# Allegro board IOT_VERSION2.brd
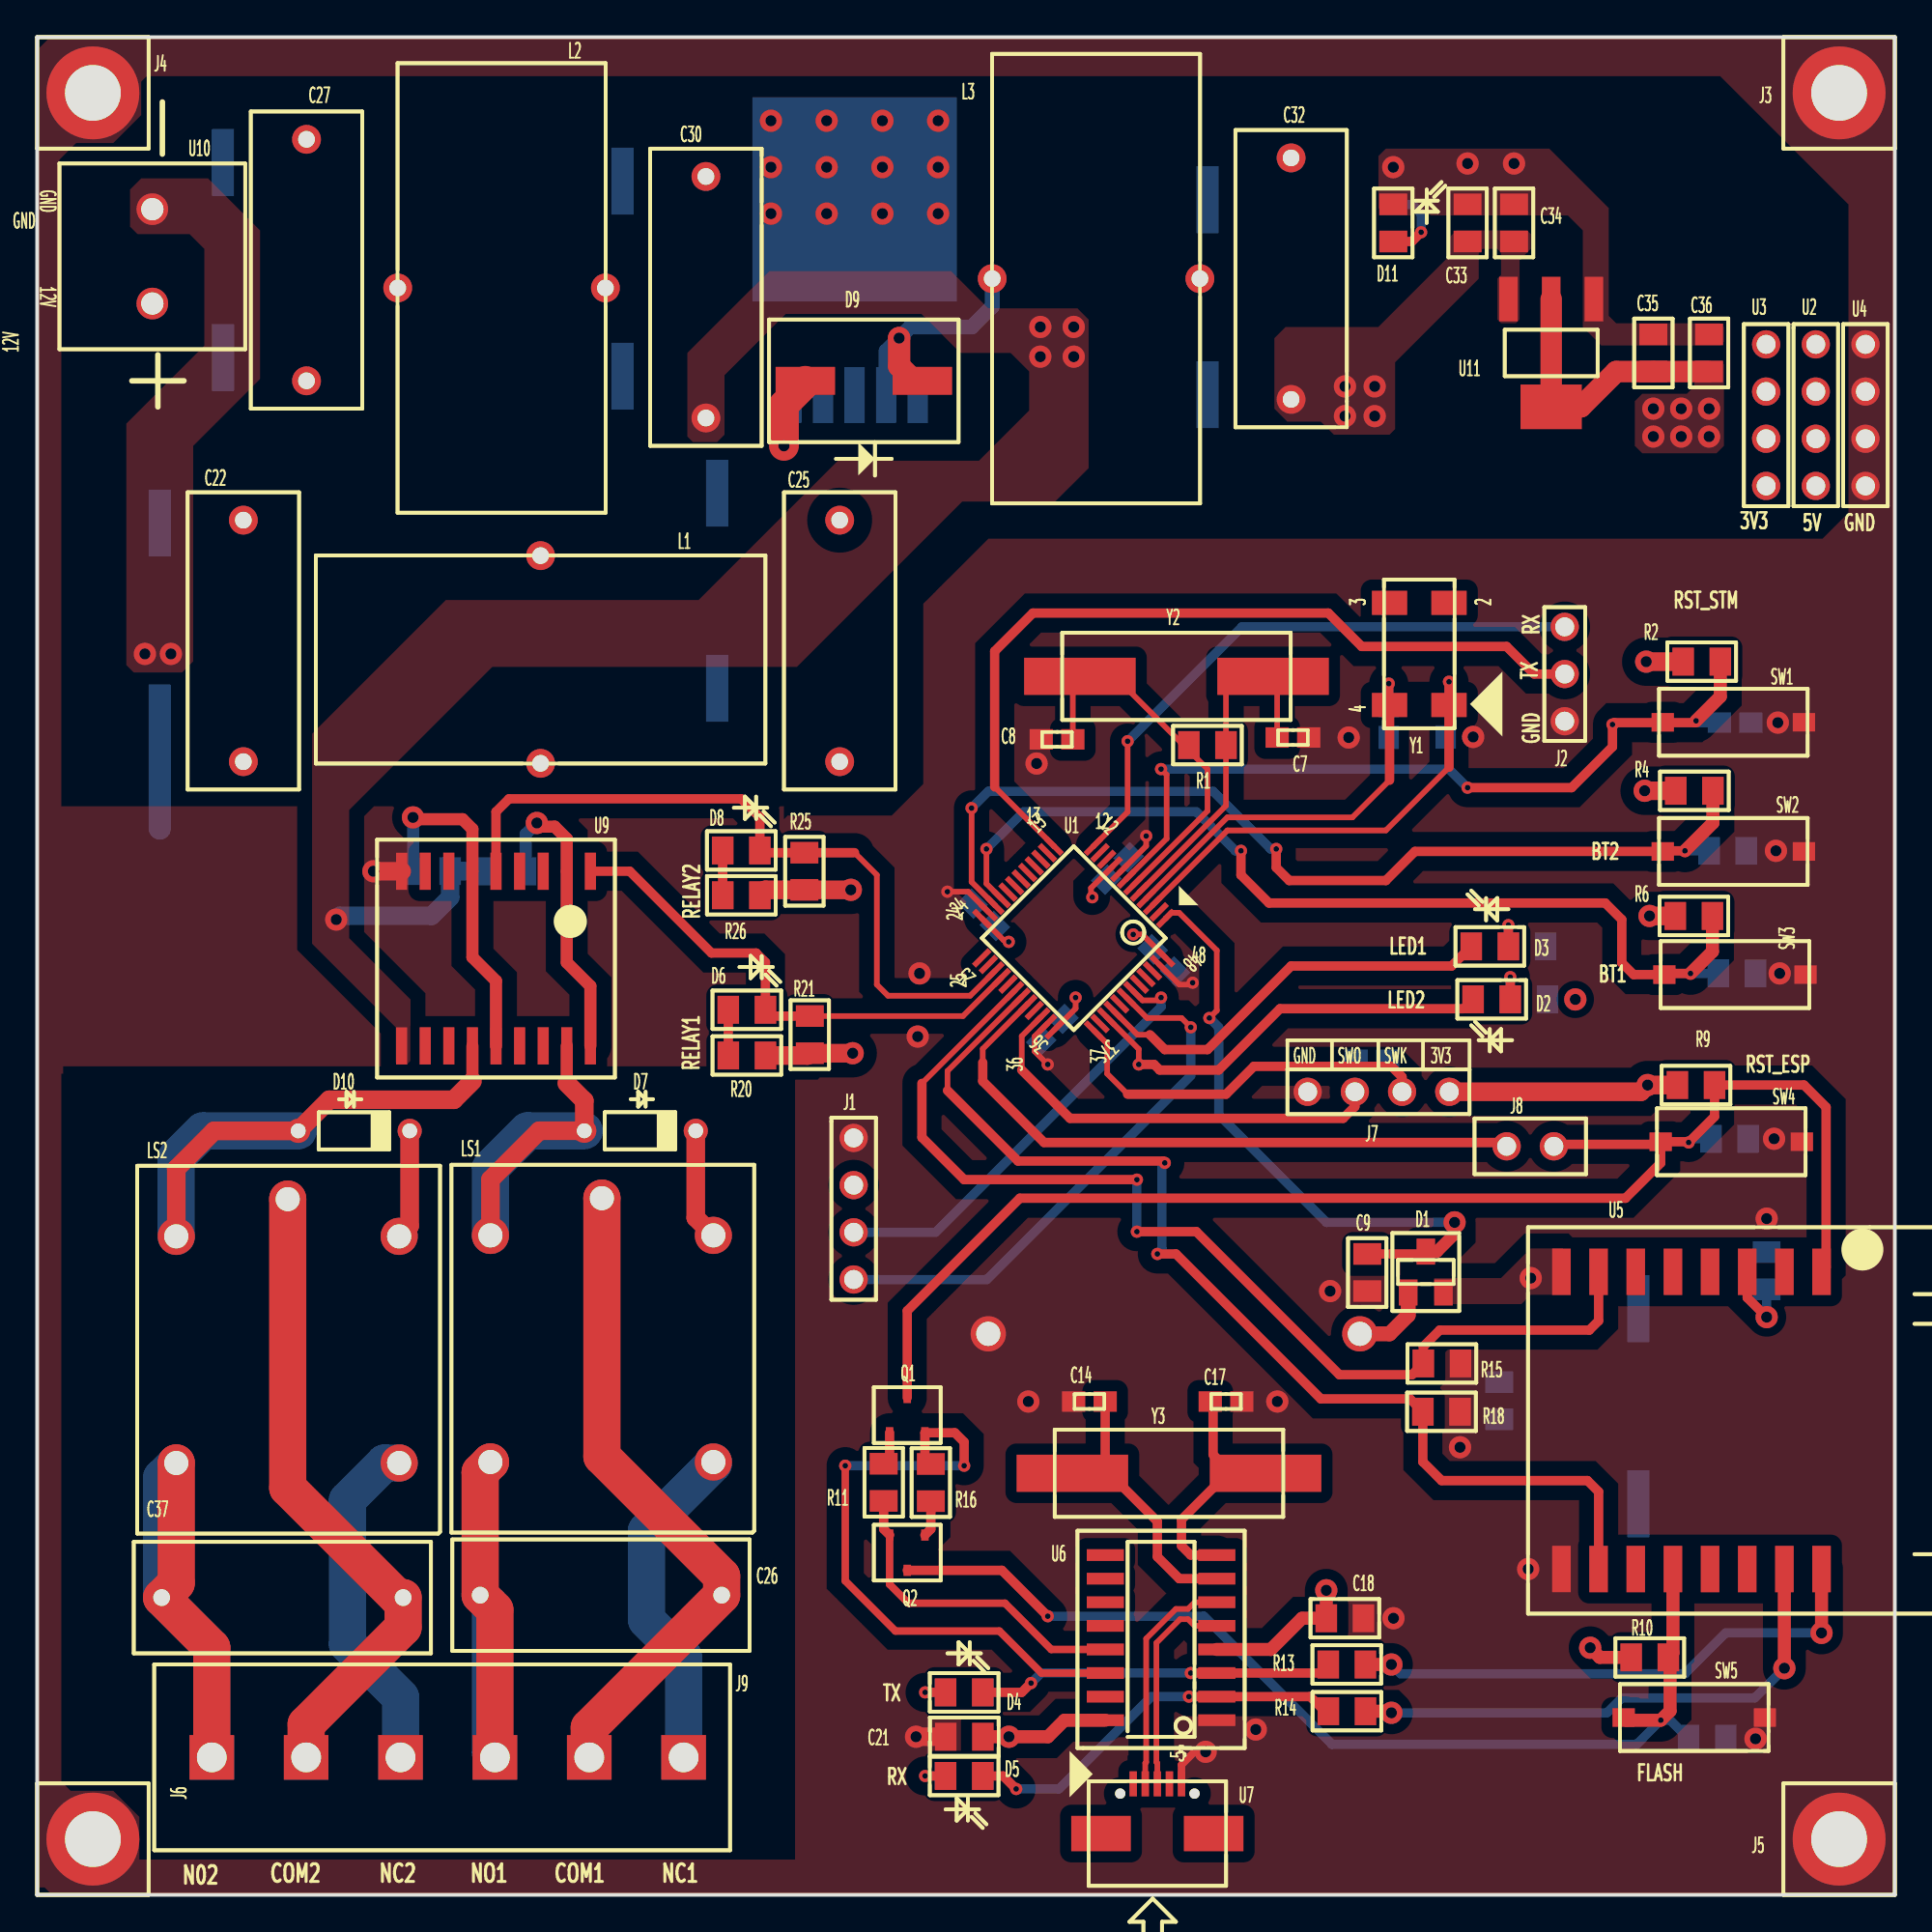
[diagram p0: board, top side]
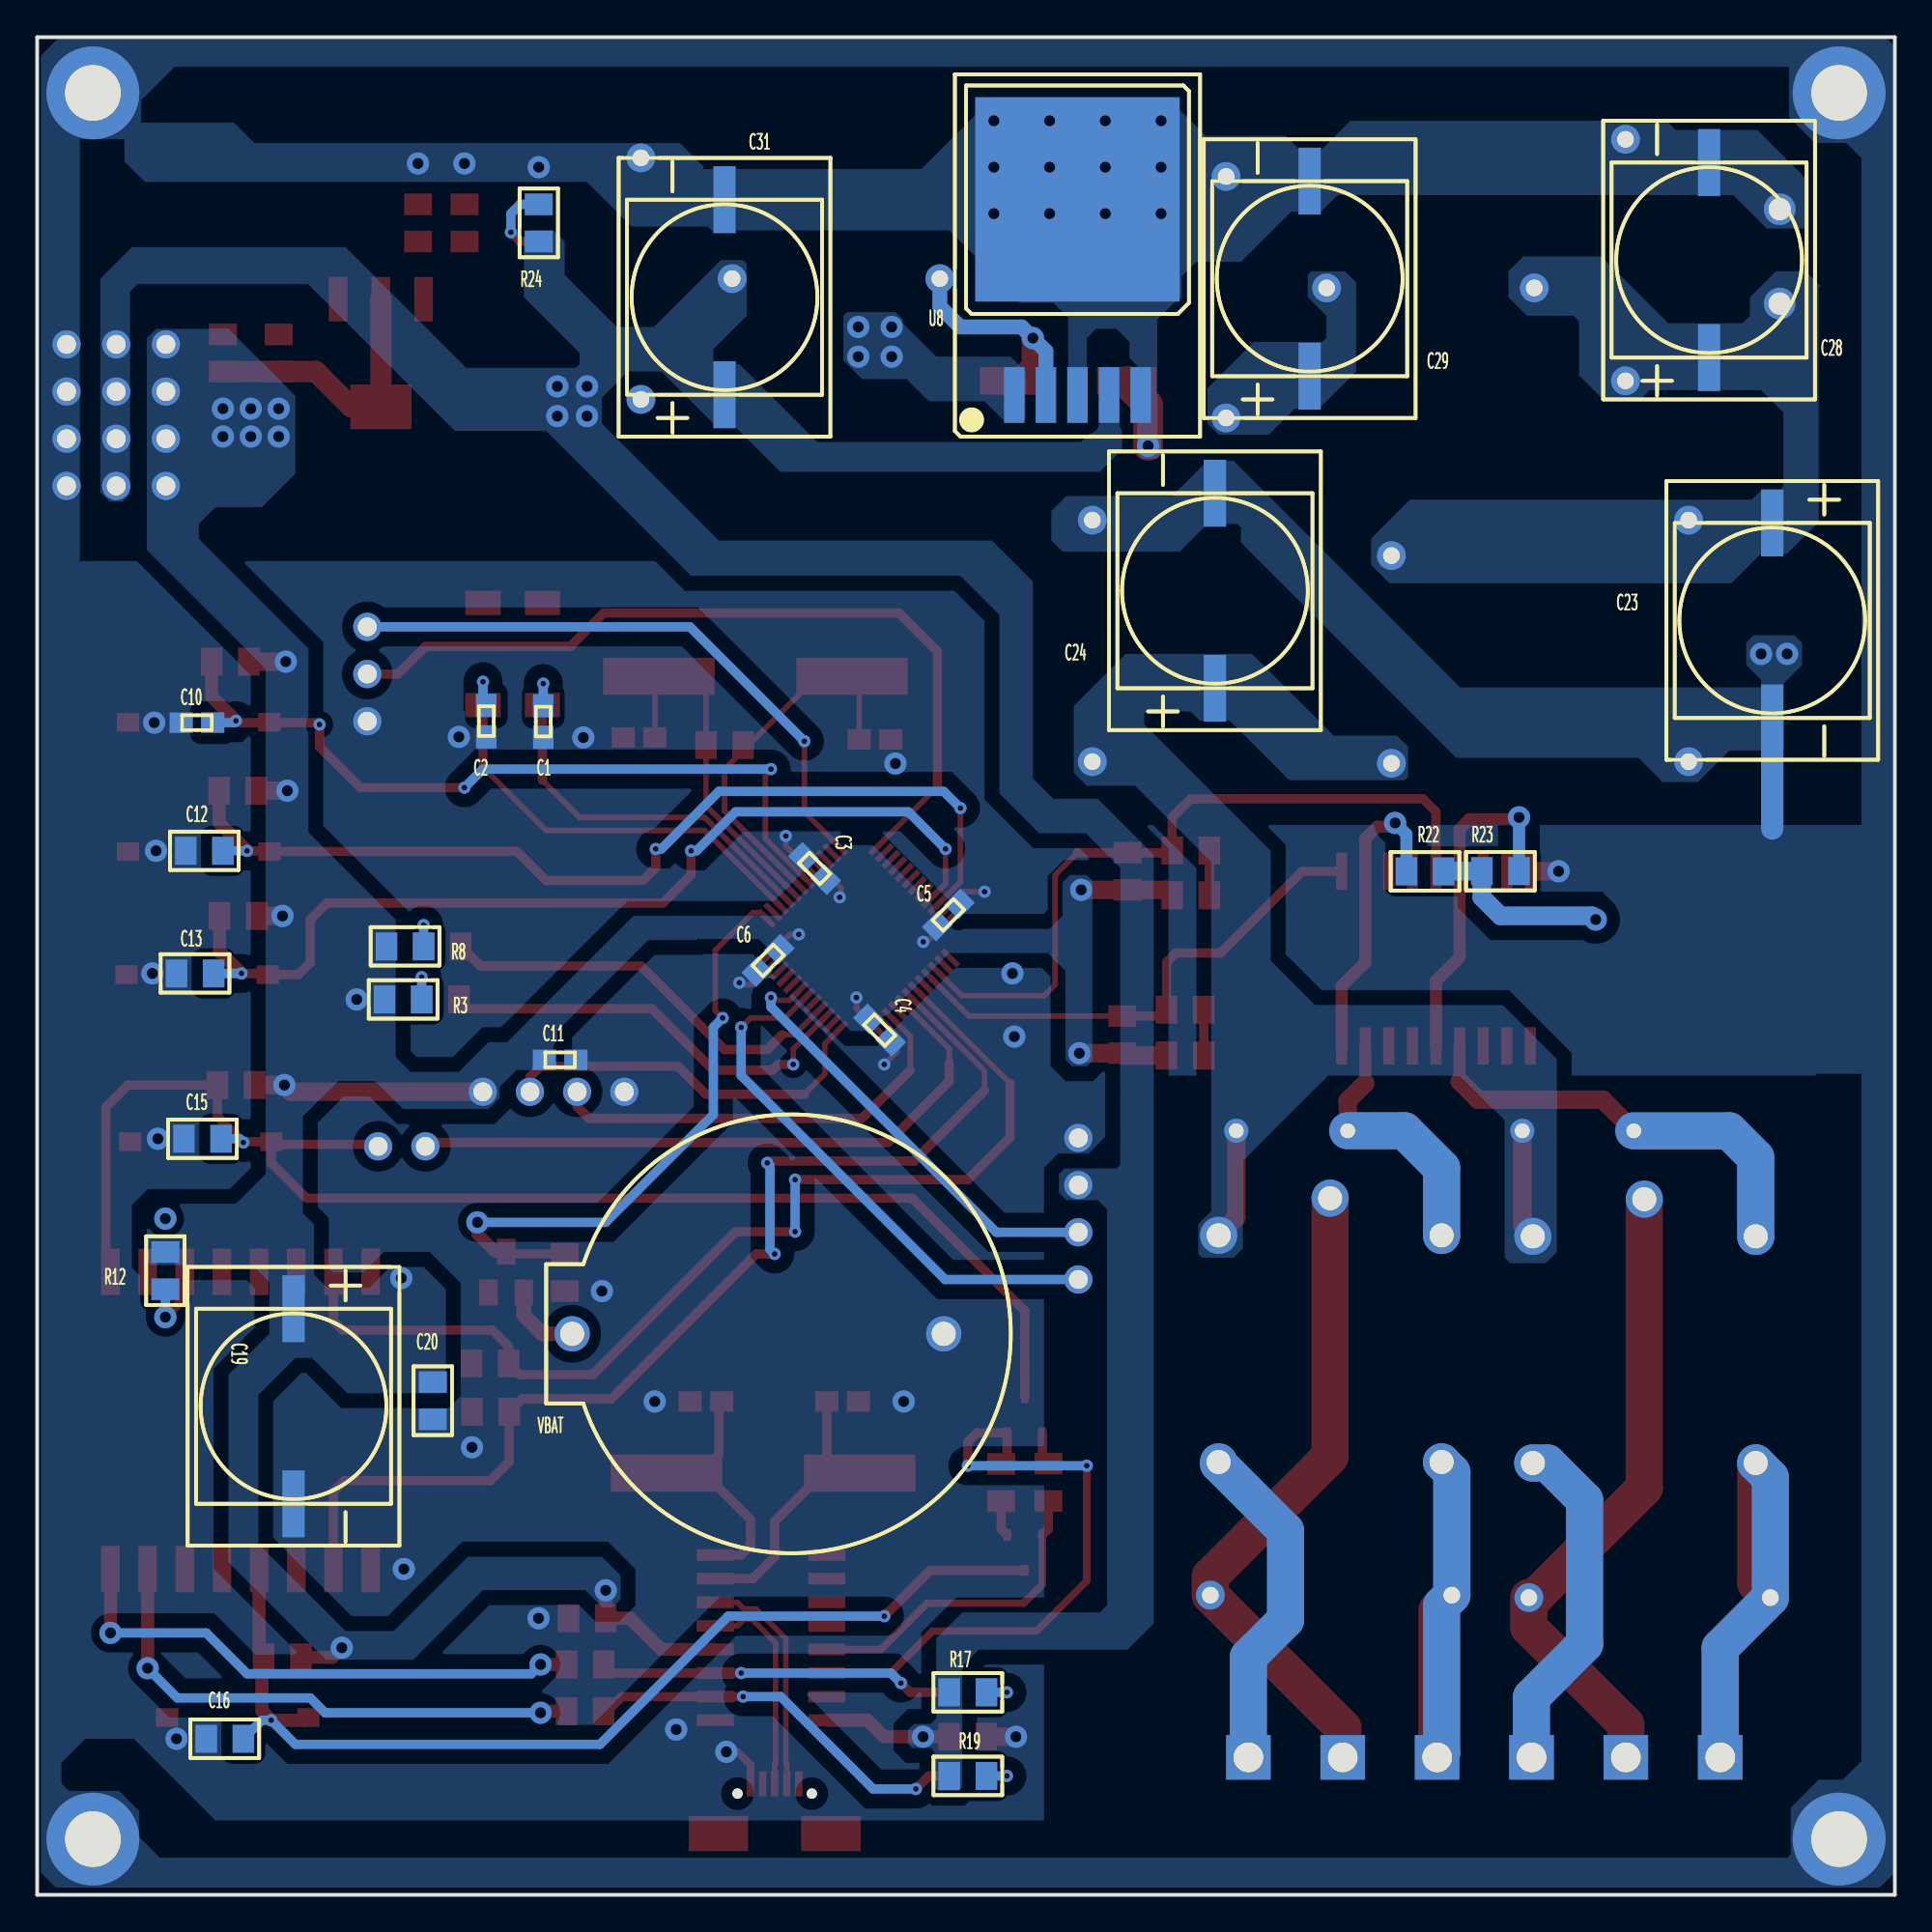
[diagram p1: board, bottom side, seen from below]

Outline 100 x 100 mm; copper layers: TOP, BOTTOM. Coordinates in mm from the lower left corner of the outline.
Outline path: 0,100 100,100 100,0 0,0 0,100

## Design rules (mm)
constraint set DEFAULT: min track width 0.5
net group D: nets D_N D_P
net group PWR: nets COM1 COM2 N23509 N46239 NC1 NC2 NO1 NO2

## Placement (name value [footprint] x y rotation side)
C1  20p  [C0603]  72.76 63.16 90 bottom
C2  20p  [C0603]  75.82 63.18 90 bottom
C3  104  [C0603]  58.15 55.25 45 bottom
C4  104  [C0603]  54.65 46.55 225 bottom
C5  104  [C0603]  50.95 52.75 135 bottom
C6  104  [C0603]  60.65 50.3 315 bottom
C7  20p  [C0603]  67.6 62.3 180 top
C8  20p  [C0603]  54.9 62.2 0 top
C9  104  [R0805]  71.6 33.5 90 top
C10  105  [C0603]  91.4 63.1 0 bottom
C11  104  [C0603]  71.85 44.95 180 bottom
C12  10uf  [R0805]  91 56.2 180 bottom
C13  10uf  [R0805]  91.5 49.6 180 bottom
C14  20p  [C0603]  56.64 26.56 0 top
C15  10uf  [R0805]  91.1 40.7 180 bottom
C16  10uf  [R0805]  89.9 8.4 180 bottom
C17  20p  [C0603]  64 26.56 180 top
C18  10uf  [R0805]  70.39 14.89 180 top
C19  470uF  [CAPACITOR_SMD]  86.2 26.3 270 bottom
C20  10uf  [R0805]  78.7 26.6 90 bottom
C21  100uf  [R0805]  49.91 8.51 0 top
C22  10uf  [CAPACITOR_THR]  11.1 67.5 90 top
C23  22uF  [CAPACITOR_SMD]  6.6 68.6 270 bottom
C24  22uF  [CAPACITOR_SMD]  36.6 70.2 90 bottom
C25  10uf  [CAPACITOR_THR]  43.2 67.5 270 top
C26  CAP 100nF 400V  [CAPACITOR_THR]  30.35 16.13 180 top
C27  10uf  [CAPACITOR_THR]  14.5 88 270 top
C28  470uF  [CAPACITOR_SMD]  10 88 90 bottom
C29  470uF_35v  [CAPACITOR_SMD]  31.5 87 90 bottom
C30  10uf  [CAPACITOR_THR]  36 86 270 top
C31  22uF  [CAPACITOR_SMD]  63 86 90 bottom
C32  10uf  [CAPACITOR_THR]  67.5 87 270 top
C33  10uf  [R0805]  77 90 270 top
C34  10uf  [R0805]  79.5 90 270 top
C35  10uf  [R0805]  87 83 270 top
C36  10uf  [R0805]  90 83 270 top
C37  CAP 100nF 400V  [CAPACITOR_THR]  13.2 16 180 top
D1  BAT54C/SOT  [BAT54C]  74.75 33.53 0 top
D2  LED1  [LED0805]  78.3 48.21 0 top
D3  LED2  [LED0805]  78.2 51.06 0 top
D4  LED2  [LED0805]  49.9 10.9 180 top
D5  LED1  [LED0805]  49.9 6.4 180 top
D6  LED  [LED0805]  38.2 47.64 180 top
D7  1N4007  [DIODE_1N4007]  32.45 41.13 180 top
D8  LED  [LED0805]  37.9 56.22 180 top
D9  DIODE SCHOTTKY31  [SS34]  44.5 81.5 180 top
D10  1N4007  [DIODE_1N4007]  17.05 41.13 180 top
D11  LED  [LED0805]  73 90 270 top
J1  HEADER 4  [HEADER_4X1]  43.95 36.94 0 top
J2  HEADER 3  [HEADER_3X1]  82.23 65.72 180 top
J3  HEADER 1  [PIN_M3]  97 97 0 top
J4  HEADER 1  [PIN_M3]  3 97 0 top
J5  HEADER 1  [PIN_M3]  97 3 0 top
J6  HEADER 1  [PIN_M3]  3 3 0 top
J7  HEADER 4x1  [HEADER_4X1]  72.2 43.23 270 top
J8  -  [HEADER_2X1]  80.37 40.29 90 top
J9  HEADER 6/SM  [TERMINAL_6X1]  37.3 12.4 180 top
L1  10uH  [INDUCTOR_THR]  27.1 66.5 270 top
L2  100uH_3a  [INDUCTOR_THR]  25 86.5 0 top
L3  10uH  [INDUCTOR_THR]  57 87 0 top
LS1  RELAY SPDT  [RL_10A_5V]  30.4 29.4 270 top
LS2  RELAY SPDT  [RL_10A_5V]  13.49 29.35 270 top
Q1  -  [C1815]  46.84 25.82 0 top
Q2  -  [C1815]  46.84 18.42 180 top
R1  1M  [R0805]  62.99 61.89 180 top
R2  10k  [R0805]  89.61 66.38 0 top
R3  440  [R0805]  80.3 48.2 180 bottom
R4  10K  [R0805]  89.21 59.43 180 top
R6  10K  [R0805]  89.18 52.69 180 top
R8  440  [R0805]  80.2 51.06 180 bottom
R9  1K  [R0805]  89.3 43.59 180 top
R10  1K  [R0805]  86.81 12.78 180 top
R11  10K  [R0805]  45.57 22.21 270 top
R12  12k  [R0805]  93.1 33.6 270 bottom
R13  470  [R0805]  70.5 12.4 0 top
R14  470  [R0805]  70.5 9.88 0 top
R15  10k  [R0805]  75.62 28.61 180 top
R16  10K  [R0805]  48.11 22.19 90 top
R17  440  [R0805]  49.9 10.9 180 bottom
R18  10k  [R0805]  75.59 26.01 180 top
R19  440  [R0805]  49.9 6.4 180 bottom
R20  440  [R0805]  38.2 45.18 0 top
R21  10k  [R0805]  41.59 46.3 90 top
R22  10k  [R0805]  25.29 55.09 180 bottom
R23  10k  [R0805]  21.23 55.11 0 bottom
R24  440  [R0805]  73 90 270 bottom
R25  440  [R0805]  41.3 55.1 90 top
R26  440  [R0805]  37.91 53.81 0 top
SW1  SW PUSHBUTTON  [BUTTON_SMD_3X6MM]  91.31 63.12 180 top
SW2  SW TACT-SPST  [BUTTON_SMD_3X6MM]  91.31 56.17 180 top
SW3  SW TACT-SPST  [BUTTON_SMD_3X6MM]  91.39 49.54 180 top
SW4  SW TACT-SPST  [BUTTON_SMD_3X6MM]  91.19 40.54 180 top
SW5  SW TACT-SPST  [BUTTON_SMD_3X6MM]  89.2 9.54 180 top
U1  STM32F103xx  [LQFP48]  55.8 51.5 225 top
U2  -  [HEADER_4X1]  95.74 79.65 0 top
U3  -  [HEADER_4X1]  93.07 79.65 0 top
U4  -  [HEADER_4X1]  98.42 79.65 0 top
U5  ESP8266  [ESP8266_CHIP]  89.05 25.54 270 top
U6  CH340  [CH340G]  63.5 9.4 90 top
U7  USB-MICRO-2.0  [USB-MICRO-B-2_0]  60.3 3.3 0 top
U8  -  [LM2596S]  44 86 180 bottom
U9  -  [ULN2803]  24.7 50.4 180 top
U10  Dominal_2x1  [TERMINAL_2X1]  6.2 88.2 90 top
U11  -  [AMS1117]  81.5 83 180 top
VBAT  BATTERY  [CR2032]  61.2 30.2 0 bottom
Y1  32.768k  [MC306]  74.4 66.8 90 top
Y2  8MHz  [2PIN_SMD_HC49-S]  61.33 65.59 0 top
Y3  12MHZ  [2PIN_SMD_HC49-S]  60.93 22.69 180 top

## Library data of the parts
C1-C8 C10 C11 C14 C17 C26 C37 = CAP NP
C9 C12 C13 C15 C16 C18 C20-C22 C25 C27 C30 C32-C36 = C
C19 C23 C24 C28 C29 C31 = CAP POL
D1 = BAT54C/SOT
D2-D6 D8 D11 = LED
D7 D10 = DIODE_0
D9 = DIODE SCHOTTKY31
J1 J7 = HEADER 4
J2 = HEADER 3_0
J3-J6 = HEADER 1
J8 = HEADER 2
J9 = HEADER 6/SM
L1-L3 = L
LS1 LS2 = RELAY SPDT
Q1 Q2 = 2N1069
R1-R3 R8 R12 R15 R17-R26 = RESISTOR
R4 R6 R9-R11 R13 R14 R16 = R
SW1 = SW PUSHBUTTON
SW2-SW5 = SW TACT-SPST
U1 = STM32F103xx_2
U2-U4 = HEADER_4X1
U5 = ESP8266
U6 = CH340
U7 = USB-MICRO-2.0
U8 = LM2596S
U9 = ULN2803
U10 = Dominal_0
U11 = AMS1117
VBAT = BATTERY
Y1-Y3 = CRYSTAL

## Footprints (pads in the part's own frame, mm; a bottom-side part is the same pattern mirrored in y, then rotated)
2PIN_SMD_HC49-S
  rect 6x2 smd: 1(-5.2,0) 2(5.2,0)
AMS1117
  rect 1x2.4 smd: 1(0,-2.9) 2(2.3,-2.9) 3(-2.3,-2.9)
  rect 3.3x2.4 smd: 4(0,2.9)
BAT54C
  rect 1x1.4 smd: 1(-0.95,-1.1) 2(0.95,-1.1) 3(0,1.1)
BUTTON_SMD_3X6MM
  rect 1.2x1 smd: 1(-3.8,0) 2(3.8,0)
C0603
  rect 1.25x1.1 smd: 1(-0.85,0) 2(0.85,0)
C1815
  rect 0.4x0.6 smd: 1(-0.95,-0.95) 2(0,0.95) 3(0.95,-0.95)
CAPACITOR_SMD
  rect 3.6x1.2 smd: 1(-5.25,0) 2(5.25,0)
CAPACITOR_THR
  round 1.55 hole 0.9: 1(-6.5,0) 2(6.5,0)
CH340G
  rect 0.63x2 smd: 1(0,0) 2(1.27,0) 3(2.54,0) 4(3.81,0) 5(5.08,0) 6(6.35,0) 7(7.62,0) 8(8.89,0) 9(8.89,6) 10(7.62,6) 11(6.35,6) 12(5.08,6) 13(3.81,6) 14(2.54,6) 15(1.27,6) 16(0,6)
CR2032
  round 1.9 hole 1.3: 1(10,0) 2(-10,0)
DIODE_1N4007
  round 1.3 hole 0.8: 1(-3,0) 2(3,0)
ESP8266_CHIP
  rect 2.5x1 smd: 1(-8,7) 2(-8,5) 3(-8,3) 4(-8,1) 5(-8,-1) 6(-8,-3) 7(-8,-5) 8(-8,-7) 9(8,-7) 10(8,-5) 11(8,-3) 12(8,-1) 13(8,1) 14(8,3) 15(8,5) 16(8,7)
HEADER_2X1
  round 1.52 hole 1.02: 1(0,1.27) 2(0,-1.27)
HEADER_3X1
  round 1.52 hole 1.02: 1(0,2.54) 2(0,0) 3(0,-2.54)
HEADER_4X1
  round 1.52 hole 1.02: 1(0,3.81) 2(0,1.27) 3(0,-1.27) 4(0,-3.81)
INDUCTOR_THR
  round 1.55 hole 0.9: 1(-5.59,0) 2(5.59,0)
LED0805
  rect 1.162x1.504 smd: 1(-1,0) 2(1,0)
LM2596S
  rect 1.1x3 smd: 1(-3.4,-5.265) 2(-1.7,-5.265) 3(0,-5.265) 4(1.7,-5.265) 5(3.4,-5.265)
  rect 11x11 smd: 6(0,5.265)
LQFP48
  rect 1.2x0.3 smd: 1(-4.25,2.75) 2(-4.25,2.25) 3(-4.25,1.75) 4(-4.25,1.25) 5(-4.25,0.75) 6(-4.25,0.25) 7(-4.25,-0.25) 8(-4.25,-0.75) 9(-4.25,-1.25) 10(-4.25,-1.75) 11(-4.25,-2.25) 12(-4.25,-2.75) 25(4.25,-2.75) 26(4.25,-2.25) 27(4.25,-1.75) 28(4.25,-1.25) 29(4.25,-0.75) 30(4.25,-0.25) 31(4.25,0.25) 32(4.25,0.75) 33(4.25,1.25) 34(4.25,1.75) 35(4.25,2.25) 36(4.25,2.75)
  rect 0.3x1.2 smd: 13(-2.75,-4.25) 14(-2.25,-4.25) 15(-1.75,-4.25) 16(-1.25,-4.25) 17(-0.75,-4.25) 18(-0.25,-4.25) 19(0.25,-4.25) 20(0.75,-4.25) 21(1.25,-4.25) 22(1.75,-4.25) 23(2.25,-4.25) 24(2.75,-4.25) 37(2.75,4.25) 38(2.25,4.25) 39(1.75,4.25) 40(1.25,4.25) 41(0.75,4.25) 42(0.25,4.25) 43(-0.25,4.25) 44(-0.75,4.25) 45(-1.25,4.25) 46(-1.75,4.25) 47(-2.25,4.25) 48(-2.75,4.25)
MC306
  rect 1.3x1.9 smd: (2.75,1.6) (2.75,-1.6) 1(-2.75,-1.6) 2(-2.75,1.6)
PIN_M3
  round 5 hole 3: 1(0,0)
R0805
  rect 1.162x1.504 smd: 1(-1,0) 2(1,0)
RL_10A_5V
  round 2 hole 1.3: 1(-6.1,6) 2(-6.1,-6) 3(-8.1,0) 4(6.1,-6) 5(6.1,6)
SS34
  rect 3.2x1.5 smd: 1(-3.15,0) 3(3.15,0)
TERMINAL_2X1
  round 1.7 hole 1.2: 1(2.54,0) 2(-2.54,0)
TERMINAL_6X1
  rect 2.4x2.4 hole 1.6: 1(2.5,5) 2(7.58,5) 3(12.66,5) 4(17.74,5) 5(22.82,5) 6(27.9,5)
ULN2803
  rect 0.6x2 smd: 1(-5.08,-4.7) 2(-3.81,-4.7) 3(-2.54,-4.7) 4(-1.27,-4.7) 5(0,-4.7) 6(1.27,-4.7) 7(2.54,-4.7) 8(3.81,-4.7) 9(5.08,-4.7) 10(5.08,4.7) 11(3.81,4.7) 12(2.54,4.7) 13(1.27,4.7) 14(0,4.7) 15(-1.27,4.7) 16(-2.54,4.7) 17(-3.81,4.7) 18(-5.08,4.7)
USB-MICRO-B-2_0
  rect 3.205x1.9 smd: (-3.032,0) (3.032,0)
  round 0.551 hole 0.55: (-2,2.15) (2,2.15)
  rect 0.4x1.35 smd: 1(-1.3,2.675) 2(-0.65,2.675) 3(0,2.675) 4(0.65,2.675) 5(1.3,2.675)

## Nets
3V3: C3.1 C4.1 C5.1 C6.1 C11.1 C18.2 C19.1 C20.2 C35.2 C36.2 D1.2(C2) J7.1 R2.1 R3.1 R4.2 R6.2 R8.1 R9.2 R10.2 R12.1 R20.2 R21.1 R25.1 R26.2 U1.9 U1.24 U1.36 U1.48 U3.1 U3.2 U3.3 U3.4 U5.8(VDD) U6.4 U11.1 U11.4(OUT_T)
5V: C21.2 C31.1 C32.2 C33.2 C34.2 J1.2 L3.2 R17.1 R19.1 R24.2 U2.1 U2.2 U2.3 U2.4 U6.16 U8.4 U11.2
12V: C24.1 C25.2 D7.1(K) D10.1(K) L1.2 LS1.1 LS2.1
12VIN: C22.2 C23.1 C27.2 C28.1 L1.1 L2.1 U10.2
12VOUT: C29.1 C30.2 L2.2 R22.2 R23.2 U8.1(VIN) U9.10
GND: C1.1 C2.1 C3.2 C4.2 C5.2 C6.2 C7.1 C8.1 C9.1 C10.2 C11.2 C12.1 C13.1 C14.1 C15.1 C16.1 C17.1 C18.1 C19.2 C20.1 C21.1 C22.1 C23.2 C24.2 C25.1 C27.1 C28.2 C29.2 C30.1 C31.2 C32.1 C33.1 C34.1 C35.1 C36.1 D9.3 D11.1(CATHODE) J1.1 J2.1 J3.1 J4.1 J5.1 J6.1 J7.4 R15.1 R18.1 SW1.1 SW2.1 SW3.1 SW4.1 SW5.1 U1.8 U1.23 U1.35 U1.47(VSS_3) U4.1 U4.2 U4.3 U4.4 U5.9 U6.1 U7.5 U8.3 U8.5 U8.6 U9.9 U10.1 U11.3 VBAT.2(-)
VBAT: C9.2 D1.3 U1.1
BT1: C13.2 R6.1 SW3.2 U1.21
BT2: C12.2 R4.1 SW2.2 U1.22
COM1: C26.1 J9.2 LS1.3
COM2: C37.1 J9.5 LS2.3
D_N: U6.6 U7.2
D_P: U6.5 U7.3
ENB_RESET: J8.1 U1.32
FLASH: C16.2 Q2.2 R10.1 SW5.2 U5.12
LED1: D2.1(CATHODE) U1.39
LED2: D3.1(CATHODE) U1.40
NC1: J9.1 LS1.5
NC2: J9.4 LS2.5
NO1: C26.2 J9.3 LS1.4(NO)
NO2: C37.2 J9.6 LS2.4(NO)
NRST: C15.2 J8.2 Q1.2 R9.1 SW4.2 U5.1
OSCIN: C7.2 R1.1 U1.5 Y2.2
OSCOUT: C8.2 R1.2 U1.6 Y2.1
PA0: U1.10
PA1: U1.11
PA4: U1.14
PA5: U1.15
PA6: U1.16
PA7: U1.17
PA8: U1.29
PA12: U1.33
PA15: U1.38
PB0: U1.18
PB1: U1.19
PB2: U1.20
PB5: U1.41
PB8: U1.45
PB9: U1.46
PB12: U1.25
PB13: U1.26
PC13: U1.2
PC14: C2.2 U1.3 Y1.1
PC15: C1.2 U1.4 Y1.2
RELAY1: D6.1(CATHODE) R21.2 U1.28 U9.1
RELAY2: D8.1(CATHODE) R25.2 U1.27 U9.5
RESET: C10.1 R2.2 SW1.2 U1.7
RX: J2.2 U1.13
RX_ESP: R15.2 U1.30 U5.7
RXD0: R14.2 U5.15
SCL: J1.4 U1.42
SDA: J1.3 U1.43
SWCLK: J7.2 U1.37
SWIO: J7.3 U1.34
TX: J2.3 U1.12
TX_ESP: R18.2 U1.31 U5.10
TXD0: R13.2 U5.16
XI: C14.2 U6.7(XI) Y3.2
XO: C17.2 U6.8 Y3.1
N02174: D2.2 R3.2
N02178: D3.2 R8.2
N23509: D10.2 LS2.2 U9.13
N29658: D6.2 R20.1
N34721: D1.1 VBAT.1
N37534: D9.1(CATHODE) L3.1 U8.2
N37634: D11.2 R24.1
N45950: R22.1 U9.2 U9.18
N46239: D7.2 LS1.2 U9.17
N46900: D8.2 R26.1
N48132: R23.1 U9.6 U9.14
N71730: R12.2 U5.3
N78013: Q1.1 R11.1
N78017: Q2.1 R16.1
N78025: Q2.3(E) R11.2 U6.13
N78046: Q1.3(E) R16.2 U6.14
N80376: D4.1(CATHODE) R13.1 U6.3
N80380: D5.1(CATHODE) R14.1 U6.2
N86911: D5.2 R19.2
N86957: D4.2 R17.2

Pads without a net: U1 44; U5 2 4 5 6 11 13 14; U6 9 10 11 12 15; U7 1 4; U9 3 4 7 8 11 12 15 16

## Via types
v1: diameter 0.66, hole 0.305, TOP to BOTTOM, 43 vias
v2: diameter 1.2, hole 0.6, TOP to BOTTOM, 74 vias

## Routing (per net, layer and track width the routed paths; a pad name or vN(x,y) marks a point on that pad's centre or on a via; arc(x,y) is an arc through that point)
3V3: length 61.5
  TOP w0.3: 57.92,55.39 56.73,54.2 56.73,53.77 v1(56.8,53.7) ; U1.36 55.9,47.71 v1(55.9,48.3) ; U1.24 52.01,51.4 52.2,51.4 v1(52.3,51.3) ; v1(59,51.7) 59.49,51.7 U1.48
  TOP w0.7: U6.4 66.41,13.21 68.09,14.89 C18.2 v2(69.39,16.39) ; v2(83.6,13.3) 84.12,12.78 R10.2
  TOP w1: J7.1 86.33,43.23 v2(86.69,43.59) R9.2 ; v2(43.9,45.3) R21.1 41.47,45.18 R20.2 ; R2.1 v2(86.62,66.38) ; R6.2 v2(86.79,52.69) ; v2(43.8,54.1) R25.1 39.2,54.1 R26.2 ; R4.2 v2(86.53,59.43)
  TOP w1.15: C36.2 C35.2 85,82 83.1,80.1 U11.4 U11.1
  vias: v2(80.4,33.2) v2(82.8,48.2) v2(87,80) v2(87,78.5) v2(88.5,80) v2(88.5,78.5) v2(90,80) v2(90,78.5)
5V: length 7
  TOP w0.7: C21.2 v2(52.31,8.51) 54.41,8.51 55.3,9.4 U6.16
  vias: v2(70.4,81.2) v2(70.4,79.6) v2(72,81.2) v2(72,79.6)
12V: length 11.9
  TOP w1: LS2.1 20.05,36.01 D10.1 ; LS1.1 35.45,36.45 D7.1
12VOUT: length 10.1
  BOTTOM w1: R22.2 24.28,55.11 R23.2 22.23,53.7 21.23,52.7 16.3,52.7 v2(16.1,52.5)
  vias: v2(54,84.4) v2(54,82.8) v2(55.8,84.4) v2(55.8,82.8)
GND: length 26.1
  TOP w0.3: v1(54.4,44.7) 53.7,45.4 53.7,46.22 U1.35 ; 58.27,55.04 59.7,56.46 v1(59.7,57) ; U1.23 50.12,54 v1(49,54) ; v1(62.2,49.1) 62.1,49 61.48,49 U1.47
  TOP w0.4: v2(62.9,7.7) 62.3,7.7 61.6,7 U7.5
  TOP w0.5: 70.6,62.5 v2(70.6,62.3)
  TOP w1: U9.9 v2(18.1,55.1) ; C21.1 v2(47.31,8.51)
  TOP w1.6: D9.3 41.35,81.35 40.2,80.2 v2(40.2,78)
  BOTTOM w1.2: 6.6,57.4 C23.2
  vias: v2(5.8,66.8) v2(7.2,66.8) v2(39.5,95.5) v2(39.5,93) v2(39.5,90.5) v2(42.5,95.5) v2(42.5,93) v2(42.5,90.5) v2(45.5,95.5) v2(45.5,93) v2(45.5,90.5) v2(47.4,46.2) v2(47.5,49.6) v2(48.5,95.5) v2(48.5,93) v2(48.5,90.5) v2(53.36,26.56) v2(53.8,60.9) v2(65.6,8.9) v2(66.76,26.56) v2(69.6,32.5) v2(73,93) v2(73.01,14.89) v2(76.59,24.09) v2(77,93.2) v2(77.3,62.33) v2(79.5,93.2) v2(80.26,17.54) v2(92.5,8.4) v2(93.1,36.4) v2(93.5,40.7) v2(93.6,56.2) v2(93.7,63.1) v2(93.8,49.6)
VBAT: length 33.8
  TOP w0.3: U1.1 60.75,52.56 61.05,52.87 61.47,52.87 63.5,50.84 63.5,47.6 v1(63.1,47.2)
  TOP w0.5: D1.3 74.63,34.5 C9.2
  TOP w0.65: v2(76.3,36.2) 76.3,35.58 75.35,34.63 D1.3
  BOTTOM w0.5: v1(63.1,47.2) 63.6,46.7 63.6,42 69.4,36.2 v2(76.3,36.2)
BT1: length 52.6
  TOP w0.3: 51.91,53.62 51.1,54.43 v1(51.1,56.3)
  TOP w0.5: v1(89,49.6) 87.66,49.6 SW3.2 85.94,49.54 85.3,50.17 85.3,52.5 84.41,53.39 66.31,53.39 64.8,54.9 v1(64.8,56.2)
  TOP w0.7: v1(89,49.6) 90.18,50.78 R6.1
  BOTTOM w0.5: v1(51.1,56.3) 53.1,58.3 62.4,58.3 64.5,56.2 v1(64.8,56.2) ; C13.2 v1(89,49.6)
BT2: length 52.9
  TOP w0.3: v1(50.3,58.5) 50.3,54.53 U1.22 51.56,53.27
  TOP w0.5: v1(66.7,56.3) 66.7,55.3 67.4,54.6 72.6,54.6 74.17,56.17 SW2.2 87.54,56.2 v1(88.7,56.2)
  TOP w0.7: v1(88.7,56.2) 90.21,57.71 R4.1
  BOTTOM w0.5: v1(66.7,56.3) 66.4,56.3 63.3,59.4 51.2,59.4 v1(50.3,58.5) ; C12.2 v1(88.7,56.2)
COM1: length 35.7
  TOP w2: J9.2 29.72,9.01 C26.1 36.85,17.15 30.4,23.6 LS1.3
COM2: length 35
  TOP w2: J9.5 14.48,9.18 19.7,14.4 C37.1 19.4,16 13.49,21.91 LS2.3
D_N: length 12.4
  TOP w0.3: U7.2 59.65,7.09 59.7,7.14 59.7,13.79 61.3,15.39 61.95,15.39 62.31,15.75 U6.6
D_P: length 11.5
  TOP w0.3: U6.5 62.31,14.48 61.95,14.84 61.52,14.84 60.25,13.56 60.25,7.14 60.3,7.09 U7.3
ENB_RESET: length 34.8
  TOP w0.3: 50.9,44.8 50.9,45.54 U1.32 53.33,47.96
  TOP w0.5: J8.1 78.9,40.5 54.2,40.5 50.9,43.8 50.9,44.8
FLASH: length 57.4
  TOP w0.5: Q2.2 51.93,17.47 v1(54.4,15)
  TOP w0.7: U5.12 88.05,13.03 R10.1 87.9,12.69 87.9,9.9 v1(87.4,9.4) 85.55,9.4 SW5.2
  BOTTOM w0.5: C16.2 87.9,9.4 v1(87.4,9.4) 86.1,8.1 69.7,8.1 62.8,15 v1(54.4,15)
LED1: length 23
  TOP w0.3: v1(59.3,44.7) 59.3,45.52 57.57,47.26
  TOP w0.5: D2.1 76.79,47.7 66.9,47.7 63.6,44.4 60.43,44.4 60.13,44.7 v1(59.3,44.7)
LED2: length 22.5
  TOP w0.3: 57.92,47.61 59.23,46.3 59.9,46.3
  TOP w0.5: D3.1 76.14,50 67.5,50 63,45.5 60.7,45.5 59.9,46.3
NC1: length 18.2
  BOTTOM w2: J9.1 34.8,12.8 32.8,14.8 32.8,19.6 36.4,23.2 LS1.5
NC2: length 18.6
  BOTTOM w2: J9.4 19.56,10.64 16.7,13.5 16.7,21.25 18.7,23.25 LS2.5
NO1: length 32.9
  TOP w2: J9.3 24.64,15.34 C26.2 23.85,22.75 LS1.4
  BOTTOM w2: LS1.4 23.85,22.75 C26.2 24.4,15.58 24.4,7.64 J9.3
NO2: length 34.6
  TOP w2: J9.6 9.4,13.3 C37.2 7.49,16.79 LS2.4
  BOTTOM w2: J9.6 9.4,13.3 C37.2 6.7,22.46 LS2.4
NRST: length 77.5
  TOP w0.5: SW4.2 88.86,40.54 v1(88.9,40.5) 90.3,41.9 R9.1 95.11,43.59 96.3,42.4 96.3,33.78 U5.1 ; SW4.2 87.39,39.39 85.5,37.5 52.9,37.5 46.84,31.44 Q1.2 ; SW4.2 87.25,40.4 81.75,40.4 J8.2
  BOTTOM w0.5: C15.2 89.1,40.7 v1(88.9,40.5)
OSCIN: length 19.2
  TOP w0.3: C7.2 66.75,65.37 Y2.2 64.49,65.59 63.99,65.09 R1.1 63.99,58.63 59.34,53.98
OSCOUT: length 20.6
  TOP w0.3: C8.2 55.75,65.22 Y2.1 58.01,65.59 61.71,61.89 R1.2 61.99,61.6 63,60.6 63,58.35 U1.6
PC14: length 25
  TOP w0.3: 60.04,53.27 60.04,53.27 64.07,57.3 72.6,57.3 76,60.7
  TOP w0.5: 76,60.7 Y1.1 v1(76,65.3)
  BOTTOM w0.5: v1(76,65.3) 76,64.21 75.82,64.03
PC15: length 22.2
  TOP w0.3: 59.69,53.62 59.69,53.62 64.07,58 70.8,58 72.8,60
  TOP w0.5: v1(72.76,65.2) 72.76,64.09 Y1.2 72.8,60
  BOTTOM w0.5: C1.2 v1(72.76,65.2)
RELAY1: length 27.7
  TOP w0.3: R21.2 49.84,47.3 51.91,49.38
  TOP w0.5: U9.1 31.9,55.1 36.3,50.7 38.7,50.7 39.2,50.2 D6.1 39.54,47.3 R21.2
RELAY2: length 39.8
  TOP w0.3: 44,56.1 45.2,54.9 45.2,49 45.8,48.4 50.23,48.4 51.56,49.73
  TOP w0.5: 44,56.1 R25.2 39.02,56.1 D8.1 38.9,58 37.9,59 25.4,59 24.7,58.3 U9.5
RESET: length 43.4
  TOP w0.3: v1(60.5,60.6) 60.8,60.3 60.8,56.85 U1.7
  TOP w0.5: v1(77,59.6) 82.6,59.6 84.8,61.8 v1(84.8,63) 84.9,63.1 87.49,63.1 SW1.2 87.53,63.1 89.2,63.1 v1(89.3,63.2)
  TOP w0.7: v1(89.3,63.2) 90.61,64.5 R2.2
  BOTTOM w0.5: v1(77,59.6) 76,60.6 v1(60.5,60.6) ; v1(89.3,63.2) 89.4,63.1 C10.1
RX: length 44.7
  TOP w0.3: U1.13 54.74,56.45 51.54,59.64
  TOP w0.5: J2.2 80.58,65.72 79.1,67.2 71.3,67.2 69.5,69 53.6,69 51.54,66.94 51.54,59.64
RX_ESP: length 57.7
  TOP w0.3: 47.63,43.68 U1.30
  TOP w0.5: 47.63,43.68 47.63,40.77 49.9,38.5 v1(59.2,38.5) ; v1(59.2,35.7) 62.4,35.7 70.1,28 74.01,28 R15.2 74.62,29.52 75.5,30.4 83.55,30.4 84.05,30.9 U5.7
  BOTTOM w0.5: v1(59.2,35.7) v1(59.2,38.5)
RXD0: length 28.9
  TOP w0.7: U5.15 v2(94.05,12.2) ; v2(72.9,9.8) 72.82,9.88 R14.2
  BOTTOM w0.5: v2(72.9,9.8) 84.5,9.8 85.3,10.6 92.45,10.6 v2(94.05,12.2)
SCL: length 29.4
  TOP w0.3: v1(62.1,46.7) 61.6,47.2 59.75,47.2 U1.42
  BOTTOM w0.5: J1.4 51.12,33.12 62.1,44.1 v1(62.1,46.7)
SDA: length 23.9
  TOP w0.3: v1(60.5,48.3) 60.35,48.15 59.5,48.15 U1.43
  BOTTOM w0.5: v1(60.5,48.3) 60.5,47.8 48.37,35.66 J1.3
SWCLK: length 20.6
  TOP w0.3: 58.7,43.1 57.6,44.2 57.6,45.81 U1.37
  TOP w0.5: 58.7,43.1 64,43.1 65.5,44.6 72.9,44.6 73.47,44.03 J7.2
SWIO: length 23.4
  TOP w0.3: 54.03,47.26 53,46.23 53,44.4
  TOP w0.5: 53,44.4 55.6,41.8 70.3,41.8 70.93,42.43 J7.3
TX: length 32.5
  TOP w0.3: 56.86,56.45 U1.12 58.7,58.29 v1(58.7,62.1)
  BOTTOM w0.5: J2.3 64.86,68.26 v1(58.7,62.1)
TX_ESP: length 59.8
  TOP w0.3: U1.31 49,44.35 49,43.3
  TOP w0.5: v1(60.3,34.5) 61.3,34.5 69.1,26.7 73.9,26.7 R18.2 74.59,23.31 75.6,22.3 83.45,22.3 84.05,21.7 U5.10 ; v1(60.7,39.4) 60.6,39.5 52.8,39.5 49,43.3
  BOTTOM w0.5: v1(60.3,34.5) 60.55,34.75 60.55,39.25 v1(60.7,39.4)
TXD0: length 29.1
  TOP w0.7: R13.2 v2(72.9,12.4) ; U5.16 v2(96.05,14.1)
  BOTTOM w0.5: v2(72.9,12.4) 73.4,11.9 88.7,11.9 90.9,14.1 v2(96.05,14.1)
XI: length 15.3
  TOP w0.5: 56.99,22.69 57.49,23.19 C14.2 ; 56.99,22.69 57.71,22.69 60.3,20.1 60.3,18.2 61.48,17.02 U6.7 ; 56.99,22.69 Y3.2
XO: length 13.4
  TOP w0.5: 64.31,22.69 64.09,22.69 61.6,20.2 61.6,18.79 62.1,18.29 U6.8 ; 64.31,22.69 63.3,23.7 63.3,26.4 C17.2 ; 64.31,22.69 Y3.1
N02174: length 2.4
  TOP w0.5: v1(79.3,49.4) 79.3,48.21 D2.2
  BOTTOM w0.5: R3.2 v1(79.3,49.4)
N02178: length 2.3
  TOP w0.5: D3.2 v1(79.2,52.2)
  BOTTOM w0.5: v1(79.2,52.2) D3.2
N23509: length 34.8
  TOP w0.65: U9.13 23.43,43.8
  TOP w1: LS2.2 7.49,39.09 9.53,41.13 D10.2 15.73,42.8 22.43,42.8 23.43,43.8
  BOTTOM w2: LS2.2 7.49,39.69 8.93,41.13 D10.2
N29658: length 2.5
  TOP w0.5: D6.2 37.2,47.64 R20.1
N34721: length 4.2
  TOP w0.8: D1.1 73.8,31.2 72.8,30.2 VBAT.1
N37534: length 13.7
  TOP w1.2: v2(46.4,83.8) 46.4,82.3 47.2,81.5 D9.1
  BOTTOM w0.8: U8.2 45.7,83.1 v2(46.4,83.8) 47,84.4 50.31,84.4 51.41,85.5 L3.1
N37634: length 4.4
  TOP w0.5: v1(74.5,89.5) 74,89 D11.2
  BOTTOM w0.5: v1(74.5,89.5) 74.5,90.5 74,91 R24.1
N45950: length 16.5
  TOP w0.65: U9.18 29.78,48.92 28.51,50.19 U9.2 28.51,56.85 27.86,57.5 27.1,57.5 v2(26.9,57.7)
  BOTTOM w0.65: R22.1 26.29,57.09 v2(26.9,57.7)
N46239: length 23.6
  TOP w0.65: U9.17 28.51,43.69
  TOP w1: LS1.2 24.4,38.5 27.03,41.13 29.45,41.13 29.45,42.75 28.51,43.69
  BOTTOM w2: LS1.2 24.4,39.13 26.4,41.13 29.45,41.13
N46900: length 2.4
  TOP w0.5: D8.2 36.9,53.81 R26.1
N48132: length 18.5
  TOP w0.65: U9.14 24.7,49.2 23.43,50.47 U9.6 23.43,57.37 22.9,57.9 20.33,57.9 v2(20.23,58)
  BOTTOM w0.65: R23.1 v2(20.23,58)
N71730: length 4.4
  TOP w0.5: U5.3 92.05,32.15 v2(93.1,31.1)
  BOTTOM w0.5: R12.2 v2(93.1,31.1)
N78013: length 1.8
  TOP w0.5: R11.1 45.89,23.53 Q1.1
N78017: length 2
  TOP w0.5: Q2.1 48.11,19.69 R16.1
N78025: length 17.7
  TOP w0.4: Q2.3 45.89,16.71 46.9,15.7 52.1,15.7 54.59,13.21 U6.13
  TOP w0.5: Q2.3 45.57,19.69 R11.2
N78046: length 34.1
  TOP w0.4: v1(43.5,23.1) 43.5,16.9 46.2,14.2 51.8,14.2 54.06,11.94 U6.14
  TOP w0.5: v1(49.9,23.1) 49.9,24.37 49.4,24.87 Q1.3 47.79,23.51 R16.2
  BOTTOM w0.5: v1(43.5,23.1) v1(49.9,23.1)
N80376: length 19.2
  TOP w0.5: v1(53.5,11.4) 53,10.9 D4.1 ; v1(62.1,11.94) U6.3 69.04,11.94 R13.1
  BOTTOM w0.5: v1(53.5,11.4) 54.04,11.94 v1(62.1,11.94)
N80380: length 21.3
  TOP w0.5: v1(52.7,5.7) 52,6.4 D5.1 ; v1(62,10.67) U6.2 68.53,10.67 69.32,9.88 R14.1
  BOTTOM w0.5: v1(52.7,5.7) 55,5.7 59.97,10.67 v1(62,10.67)
N86911: length 2.2
  TOP w0.5: D5.2 v1(47.8,6.4)
  BOTTOM w0.5: v1(47.8,6.4) D5.2
N86957: length 2.2
  TOP w0.5: v1(47.8,10.9) D4.2
  BOTTOM w0.5: D4.2 v1(47.8,10.9)

## Copper pours and planes (outline as drawn; the poured copper is in the pictures)
3V3 on TOP: 75.2,33.2 78.8,33.2 80.4,34.8 82.1,34.8 82.5,34.4 82.5,32.5 82.3,32.3 80.4,32.3 79.9,31.8 75.4,31.8 75.2,32
3V3 on TOP: 89.2,82 89.2,81.2 88.8,80.8 86.4,80.8 86,80.4 86,78 86.4,77.6 90.4,77.6 90.8,78 90.8,82.4 89.6,82.4
3V3 on BOTTOM: 86.1,76.5 86.1,80.7 89.7,84.3 93.6,84.3 94.1,83.8 94.1,72.4 87.7,66 87.7,38.8 89.3,37.2 93.7,37.2 94.1,36.8 94.1,34.1 93.9,33.9 88.4,33.9 87.5,33 87.5,30.2 89.7,28 89.7,17.9 84.4,12.6 79.8,12.6 76,16.4 70.5,16.4 69.6,15.5 69,15.5 68.6,15.9 68.6,17.2 69.6,18.2 76.8,18.2 80.8,14.2 83.4,14.2 88.1,18.9 88.1,26.9 86.1,28.9 85.2,28.9 83.3,27 78.2,27 78,27.2 78,32.6 79.2,33.8 81,33.8 82.1,32.7 84.4,32.7 85.1,33.4 85.1,36.1 85.7,36.7 85.7,41.9 83.8,43.8 81.8,43.8 80.3,42.3 75.7,42.3 75.1,42.9 75.1,43.5 74.2,44.4 72.2,44.4 72,44.6 72,46.5 67.1,51.4 64.5,51.4 64.4,51.5 64.35,51.45 61.15,51.45 56.2,46.5 55.1,46.5 50.9,50.7 45.6,50.7 44.65,49.75 44.65,44.95 44.3,44.6 43.5,44.6 43.2,44.9 43.2,54.6 43.5,54.9 44.4,54.9 44.8,54.5 44.8,52.7 45.5,52 50.5,52 55,56.5 56.2,56.5 60,52.7 67.9,52.7 74.7,45.9 75.7,45.9 77.3,44.3 79.9,44.3 80.7,45.1 80.7,52.5 85.4,57.2 85.4,67.1 91.3,73 91.3,73.8 90.4,74.7 87.9,74.7
5V on TOP: 66.6,83.8 67.2,84.4 72.2,84.4 76,88.2 76,89.2 76.4,89.6 80.2,89.6 80.4,89.4 80.4,88.6 79.8,88 79.8,84.8 79.6,84.6 78.8,84.6 78.6,84.8 78.6,87 78.8,87.2 78.8,88.4 78.6,88.6 77.8,88.6 77.6,88.4 77.6,87 73.1,82.5 73.1,78.9 72.8,78.6 69.8,78.6 69.1,79.3 67.3,79.3 66.6,80
5V on BOTTOM: 42.4,82.2 41.8,82.2 41.6,82 41.6,77.8 42.8,76.6 60,76.6 62.4,79 63.4,79 66.4,82 68.2,82 69.6,80.6 69.6,79.2 63.3,72.9 48.6,72.9 46.4,70.7 46.4,60.1 45.3,59 42.9,59 39.9,56 39.9,14.6 41.3,13.2 49.3,13.2 50.2,12.3 50.2,5.8 50.4,5.6 51.5,5.6 51.7,5.8 51.7,7.7 51.9,7.9 52.9,7.9 53.1,8.1 53.1,8.9 52.8,9.2 51.9,9.2 51.6,9.5 51.6,13.8 50.2,15.2 42.8,15.2 42.4,15.6 42.4,36.9 42.9,37.4 44.6,37.4 45,37.8 45,38.8 44.7,39.1 41.9,39.1 41.7,39.3 41.7,55.3 43.55,57.15 46.05,57.15 48.2,59.3 48.2,68.9 50.3,71 64.8,71 72.6,78.8 77.5,78.8 85.4,86.7 94.6,86.7 95,86.3 95,75.4 95.4,75 96.1,75 96.6,75.5 96.6,87 94.9,88.7 83.4,88.7 76.9,82.2 71,82.2 70.8,82.4 70.8,83 73.8,86 73.8,89.2 73.4,89.6 72.2,89.6 71.6,89 71.6,87.2 68.8,84.4 66.8,84.4 63.2,88 62,88 61.8,87.8 61.8,85 63.6,83.2 63.6,82.6 63.4,82.4 62.2,82.4 58,78.2 43.8,78.2 42.8,79.2 42.8,81.8
12V on BOTTOM: 26.2,60.2 26.2,61.8 26.8,62.4 30.2,62.4 34.6,66.8 41.4,66.8 44.2,64 44.2,60.4 43.5,59.7 41,59.7 40.95,59.75 36.8,55.6 36.8,36.8 37.5,36.1 37.5,34.5 37.3,34.3 35.6,34.3 35.1,34.8 35.1,39.5 30.5,44.1 23.4,44.1 21,41.7 21,34.3 20.7,34 18.8,34 18.2,34.6 18.2,45 21.1,47.9 31.2,47.9 33.6,50.3 33.6,56.2 40.4,63 40.4,63.6 40.3,63.7 37.9,63.7 37.4,63.2 35.8,63.2 32.6,60 26.4,60
12VIN on BOTTOM: 4.1,73.9 5.8,72.2 7.2,72.2 8.8,70.6 27.2,70.6 28.2,71.6 28.2,73 26.1,75.1 7.7,75.1 7.2,75.6 6.2,75.6 6,75.8 6,79.8 7.2,81 13.2,81 13.6,80.6 15.8,80.6 17,81.8 17,84.7 17.3,85 19.8,85 20.8,86 20.8,87.4 20,88.2 15.8,88.2 12.2,84.6 8.2,84.6 7.8,85 7.8,86 6.4,87.4 4.8,87.4 4,86.6 4.1,86.5
12VOUT on TOP: 19.4,44.7 19.3,44.8 19.3,46.7 14.8,51.2 14.8,62.5 22,69.7 35.6,69.7 43.1,77.2 50.7,77.2 53.4,79.9 53.4,82 52.4,83 49.7,83 47.6,85.1 40.3,85.1 37,81.8 37,78.6 36.6,78.2 35.3,78.2 35,78.5 35,83 39.4,87.4 49.2,87.4 51.2,85.4 56,85.4 56.6,84.8 56.6,76.8 54.8,75 49.8,75 40.9,66.1 24.5,66.1 16.8,58.4 16.8,51.5 20.1,48.2 20.1,44.9 19.9,44.7 ; 1 cut-out
12VOUT on BOTTOM: 46.8,79.4 48,79.4 49,80.4 52,80.4 53.2,81.6 55.6,81.6 56.6,82.6 56.6,85 56.4,85.2 53.8,85.2 53.4,84.8 53.4,84.6 51.6,82.8 47.6,82.8 46.8,82
12VOUT on BOTTOM: 31.4,87.4 29.6,87.4 29,86.8 29,82 31,80 32.3,80 33.7,78.6 36.4,78.6 37,79.2 37,81.1 34.5,83.6 30.8,83.6 30.6,83.8 30.6,85 31.6,86 31.6,87.2
GND on TOP: 72.6,94 72.2,93.6 72.2,90.8 72.6,90.4 82.4,90.4 83.2,89.6 83.2,84.4 84.2,83.4 90.6,83.4 90.8,83.6 90.8,84.4 90.6,84.6 85,84.6 84.6,85 84.6,90.8 81.4,94
GND on TOP: 5,89.8 5,91.8 5.6,92.4 9.2,92.4 12,89.6 12,81.6 8.4,78 8.4,66.4 7.8,65.8 5.2,65.8 4.8,66.2 4.8,79.2 9,83.4 9,88.6 8.2,89.4 5.4,89.4
GND on TOP: 0.8,0 0.4,0.4 0,0.4 0,99.3 0.7,100 100,100 100,0.1 99.9,0 ; 2 cut-outs
GND on BOTTOM: 10.6,59.9 8.9,61.6 6.2,61.6 6,61.8 6,65.2 5,66.2 5,67.4 5.4,67.8 7.6,67.8 8,67.4 8,66.2 7.2,65.4 7.2,65 23.4,65 35.6,77.2 37.2,77.2 37.2,77 38.9,75.3 44.6,75.3 45.4,74.5 45.4,72.9 44.8,72.3 38.5,72.3 37,73.8 35.4,73.8 35.2,73.6 35.2,72.8 23.6,61.2 13.8,61.2 12.5,59.9
GND on BOTTOM: 0.8,0.4 0,1.2 0,99.5 0.4,99.9 5.1,99.9 5.2,100 98.8,100 99.8,99 99.8,1.2 99,0.4 ; 2 cut-outs

## Text on the board
Ref Des/Silkscreen Top: GND | SWO | SWK | 3V3 | 12V | TX | RX | LED2 | LED1 | BT2 | BT1 | FLASH | RST_STM | RST_ESP | 5V | RELAY1 | RELAY2 | N02 | COM2 | NC2 | NO1 | COM1 | NC1
